# Altium PCB Светотиристор.PcbDoc
Units mm, origin at the board's own origin, x right, y up, seen from the top; angles counter-clockwise.
Board outline 33.78 x 40.89 mm, 2 copper layers (Top Layer, Bottom Layer); 2 components, 0 nets, 56 pads, 0 vias.
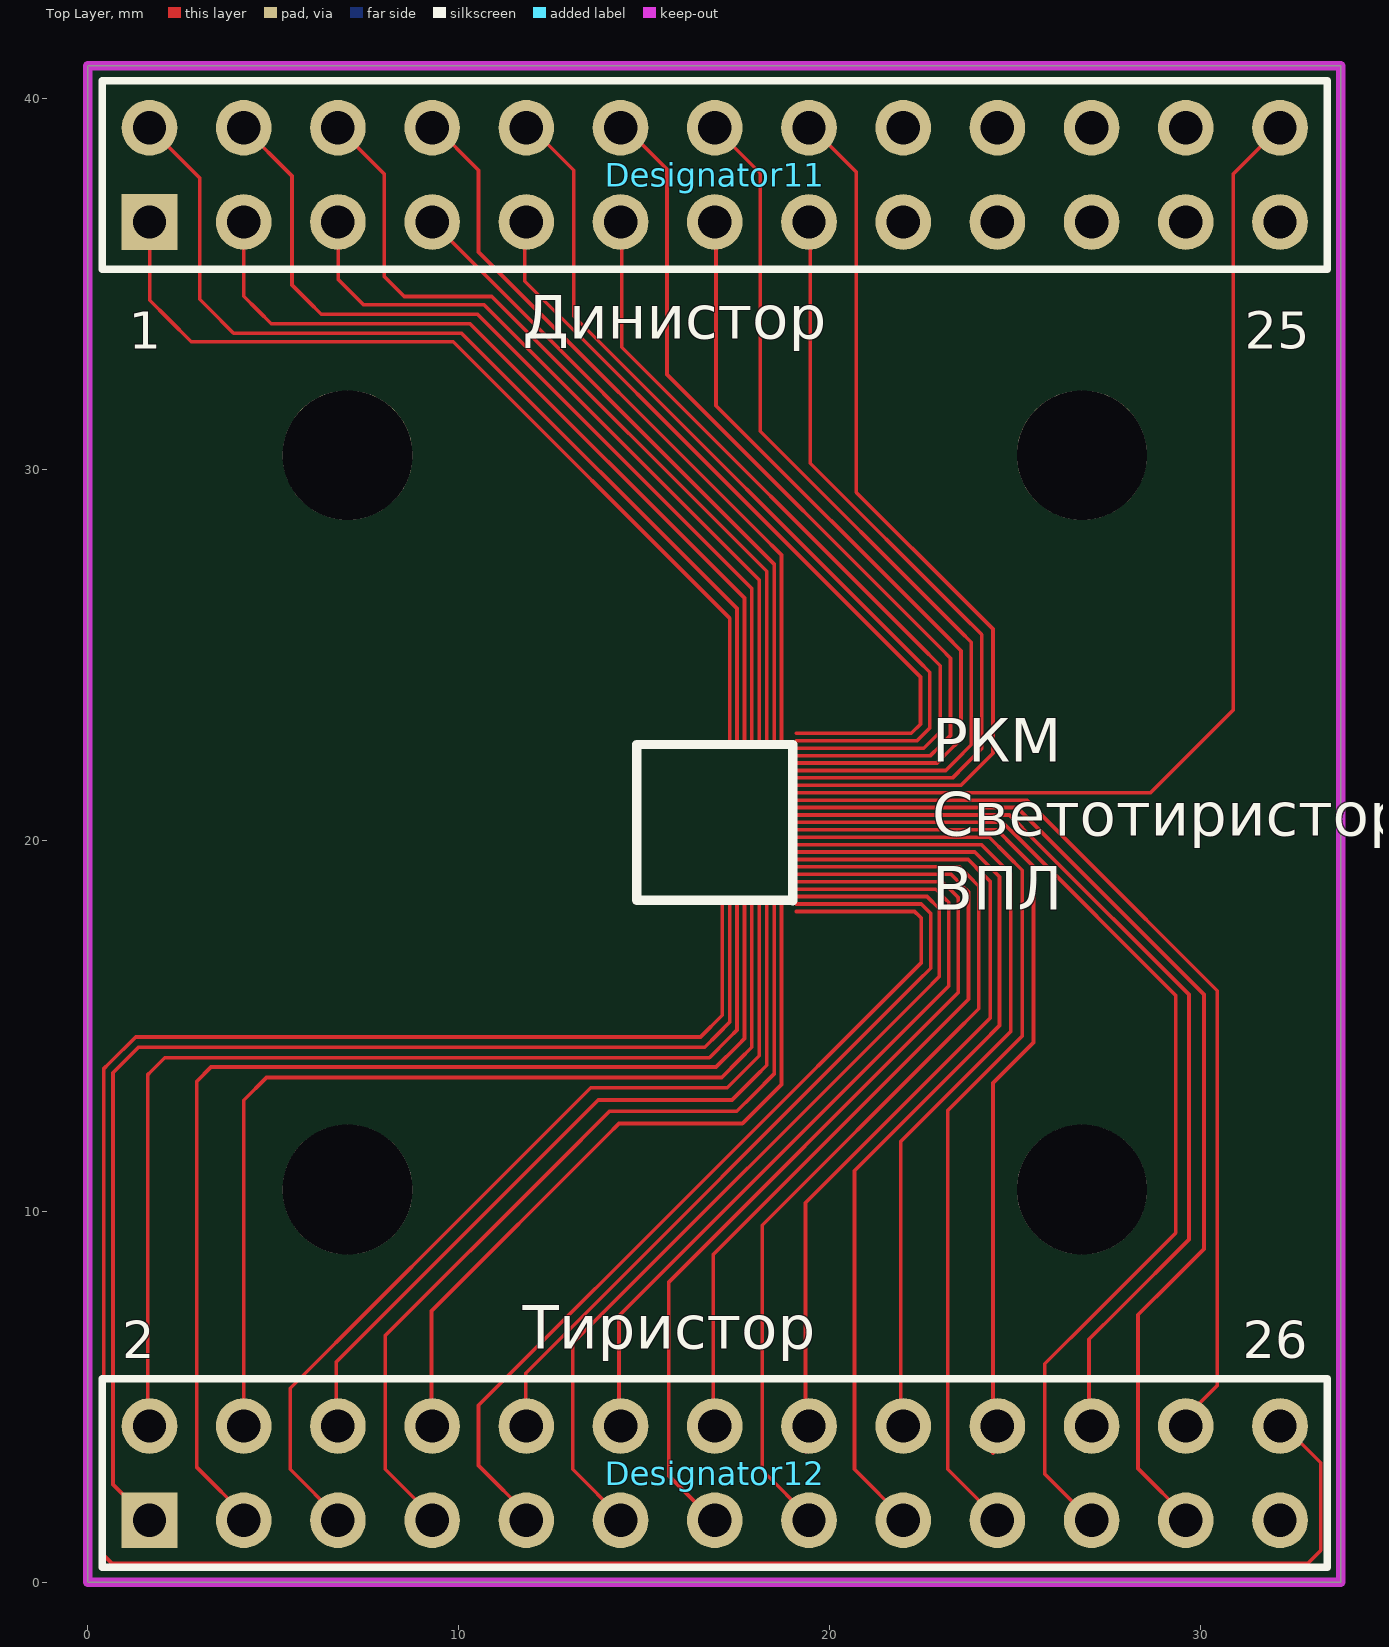
[diagram p0: Top Layer view]
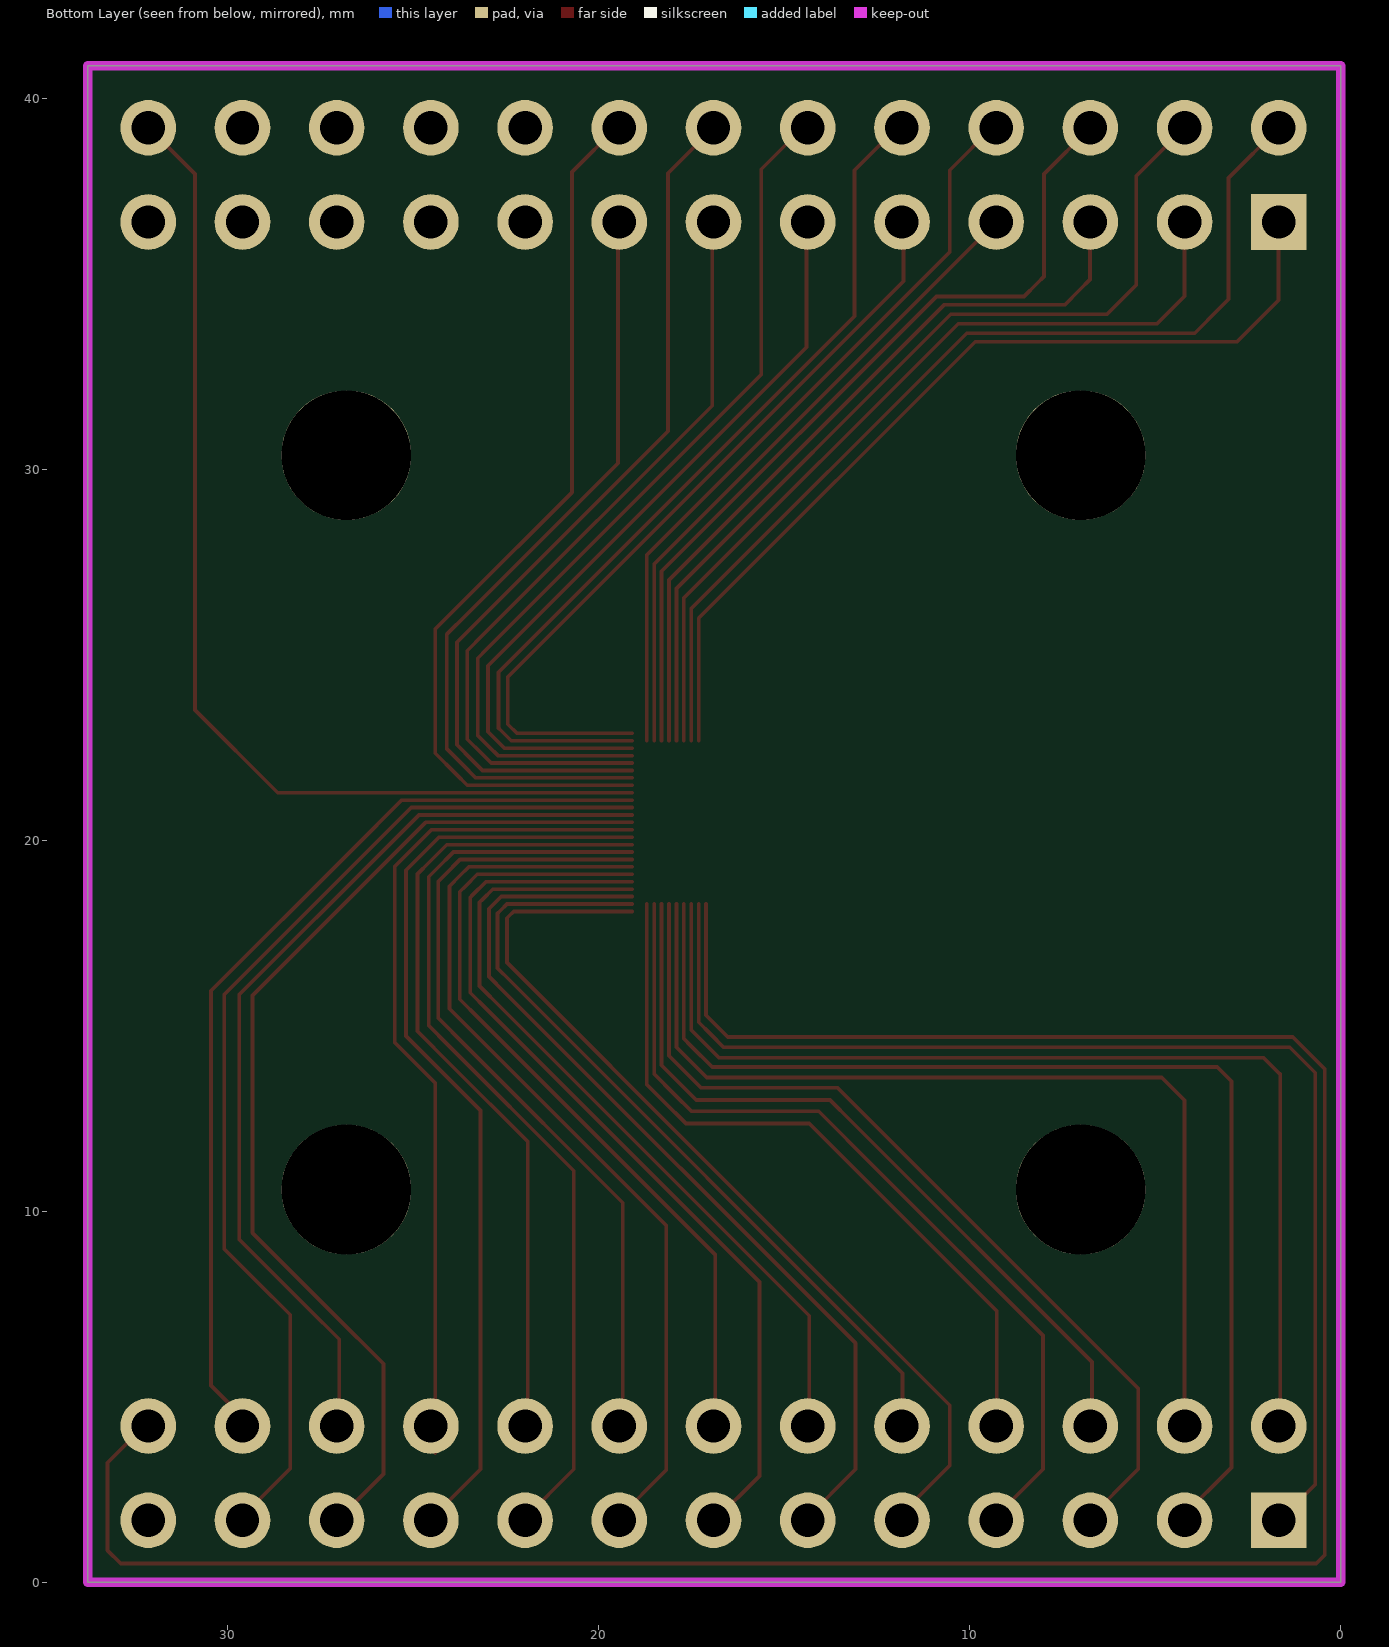
[diagram p1: Bottom Layer view, seen from below]

## Layer stack, top to bottom
Top Solder: solder mask 0.0102, Solder Resist, Dk 3.5
Top Layer: signal copper 0.0356
Dielectric 1: dielectric 0.32, FR-4, Dk 4.8
Bottom Layer: signal copper 0.0356
Bottom Solder: solder mask 0.0102, Solder Resist, Dk 3.5

## Board outline
0,0 0,40.894 33.784,40.894 33.784,0

## Design rules (kind name [scope] priority, off if disabled: settings)
Clearance [All] p1: gap=0 ignorepadtopadclearanceinfootprint=FALSE
PolygonConnect [All] p1: connectstyle=Relief reliefconductorwidth=0.254 reliefentries=4 polygonreliefangle="90 Angle" airgapwidth=0.254
RoutingVias [All] p1: holewidth=0.711 width=1.27 viastyle="Through Hole" minholewidth=0.711 minwidth=1.27 maxholewidth=0.711 maxwidth=1.27
SolderMaskExpansion [All] p1: expansion=0.102 istentingtop=FALSE
Width [All] p1: maxlimit=0.254 minlimit=0.1 preferedwidth=0.254
30 further rules are at their usual default settings.

## Components (designator, comment, footprint, x,y, rotation, side; value= is the part's Value field where it differs from the comment)
Designator11 "Comment" HDR2X13 1.669,36.678 r0 top
Designator12 "Comment" HDR2X13 1.669,1.676 r0 top

## Footprints (in the part's own frame and the unit in brackets; to place one, negate y for a bottom-side part, rotate by r counter-clockwise, add the part's x,y. Pads: shape width x height; smd on the part's side, far side on the other; paste and mask are expansions set on the pad)
HDR2X13 [mm] "Connector; Header; 13x2 Position"
  rect 1.5x1.5 hole 0.9: 1(0,0)
  round 1.5 hole 0.9: 2(0,2.54) 3(2.54,0) 4(2.54,2.54) 5(5.08,0) 6(5.08,2.54) 7(7.62,0) 8(7.62,2.54) 9(10.16,0) 10(10.16,2.54) 11(12.7,0) 12(12.7,2.54) 13(15.24,0) 14(15.24,2.54) 15(17.78,0) 16(17.78,2.54) 17(20.32,0) 18(20.32,2.54) 19(22.86,0) 20(22.86,2.54) 21(25.4,0) 22(25.4,2.54) 23(27.94,0) 24(27.94,2.54) 25(30.48,0) 26(30.48,2.54)
  silkscreen extent -1.27,-1.27 31.75,3.81

## Free pads (board coordinates)
  round 3.5 hole 3.5 unplated: 3(7.009,30.39) 3(7.01,10.591) 3(26.808,10.591) 3(26.808,30.39)

## Nets (pads, with @x,y where several pads share a name; then routed paths per layer and width w, separated by ;. In a path a pad name is that pad's centre, name@x,y a point inside that pad or via, vN(x,y) a via of type N, cw(c..) or ccw(c..) an arc to the next point about the centre after c; other vN are vias at no path point)
pads on no net: Designator11.1 Designator11.2 Designator11.3 Designator11.4 Designator11.5 Designator11.6 Designator11.7 Designator11.8 Designator11.9 Designator11.10 Designator11.11 Designator11.12 Designator11.13 Designator11.14 Designator11.15 Designator11.16 Designator11.17 Designator11.18 Designator11.19 Designator11.20 Designator11.21 Designator11.22 Designator11.23 Designator11.24 Designator11.25 Designator11.26 Designator12.1 Designator12.2 Designator12.3 Designator12.4 Designator12.5 Designator12.6 Designator12.7 Designator12.8 Designator12.9 Designator12.10 Designator12.11 Designator12.12 Designator12.13 Designator12.14 Designator12.15 Designator12.16 Designator12.17 Designator12.18 Designator12.19 Designator12.20 Designator12.21 Designator12.22 Designator12.23 Designator12.24 Designator12.25 Designator12.26
copper on no net: | length 1068.1
  Top Layer w0.1: 1.626,4.216 1.626,13.691 1.702,13.767 2.083,14.148 16.205,14.148 16.764,14.148 17.297,14.681 17.509,14.893 17.509,15.291 17.509,17.791 17.509,18.291 ; 1.66,1.667 0.686,2.642 0.686,12.065 0.686,13.741 1.168,14.224 1.372,14.427 16.205,14.427 16.637,14.427 16.993,14.783 17.309,15.099 17.309,15.291 17.309,17.791 17.309,18.291 ; 1.669,39.218 3.023,37.864 3.023,36.551 3.023,34.595 3.251,34.366 3.937,33.68 8.814,33.68 10.084,33.68 17.509,26.255 17.509,25.691 17.509,23.191 17.509,22.691 ; 1.676,36.678 1.676,34.569 2.184,34.061 2.794,33.452 6.401,33.452 9.855,33.452 17.309,25.998 17.309,23.191 17.309,22.691 ; 4.209,4.216 4.209,12.997 4.826,13.614 16.307,13.614 17.094,13.614 17.577,14.097 17.909,14.429 17.909,15.291 17.909,17.791 17.909,18.291 ; 4.209,36.678 4.209,34.678 4.597,34.29 4.953,33.934 8.28,33.934 10.312,33.934 17.709,26.538 17.709,25.691 17.709,23.191 17.709,22.691 ; 4.209,39.218 5.512,37.915 5.512,36.246 5.512,34.976 5.944,34.544 6.299,34.188 9.119,34.188 10.516,34.188 17.909,26.795 17.909,25.691 17.909,23.191 17.909,22.691 ; 4.289,1.756 2.946,3.099 2.946,3.81 2.946,13.513 3.327,13.894 16.358,13.894 16.942,13.894 17.526,14.478 17.709,14.661 17.709,15.291 17.709,17.791 17.709,18.291 ; 6.706,4.216 6.706,5.944 13.183,12.421 13.767,13.005 16.84,13.005 17.374,13.005 18.009,13.64 18.309,13.94 18.309,15.291 18.309,17.791 18.309,18.291 ; 6.753,39.221 8.001,37.973 8.001,37.084 8.001,35.204 8.179,35.027 8.534,34.671 9.144,34.671 10.897,34.671 18.309,27.259 18.309,25.691 18.309,23.191 18.309,22.691 ; 6.756,36.678 6.756,35.128 7.036,34.849 7.442,34.442 9.068,34.442 10.693,34.442 18.109,27.027 18.109,25.691 18.109,23.191 18.109,22.691 ; 6.791,1.718 5.461,3.048 5.461,3.937 5.461,5.232 7.899,7.671 9.601,9.373 13.564,13.335 14.351,13.335 17.247,13.335 18.109,14.197 18.109,15.291 18.109,17.791 18.109,18.291 ; 9.271,4.216 9.271,7.315 13.995,12.04 14.326,12.37 16.764,12.37 17.653,12.37 18.263,12.979 18.709,13.426 18.709,15.291 18.709,17.791 18.709,18.291 ; 9.289,36.678 18.509,27.458 18.509,25.691 18.509,23.191 18.509,22.691 ; 9.343,39.272 10.541,38.075 10.541,36.932 10.541,35.865 18.136,28.27 18.709,27.697 18.709,25.691 18.709,23.191 18.709,22.691 ; 9.728,1.346 8.026,3.048 8.026,5.029 8.026,6.655 12.573,11.201 14.072,12.7 16.84,12.7 17.501,12.7 17.958,13.157 18.509,13.708 18.509,15.291 18.509,17.791 18.509,18.291 ; 11.786,36.678 11.786,35.077 17.831,29.032 22.454,24.409 22.454,23.139 22.205,22.891 22.109,22.891 19.609,22.891 19.109,22.891 ; 11.811,3.658 11.811,5.639 22.377,16.205 22.733,16.561 22.733,17.424 22.733,18.034 22.657,18.11 22.476,18.291 22.109,18.291 19.609,18.291 19.109,18.291 ; 11.896,39.285 13.106,38.075 13.106,36.449 13.106,34.138 22.403,24.841 22.708,24.536 22.708,23.927 22.708,23.038 22.631,22.962 22.36,22.691 22.109,22.691 19.609,22.691 19.109,22.691 ; 11.922,1.769 10.541,3.15 10.541,3.835 10.541,4.775 16.866,11.1 22.479,16.713 22.479,17.399 22.479,17.907 22.428,17.958 22.295,18.091 22.109,18.091 19.609,18.091 19.109,18.091 ; 14.326,4.064 14.326,7.188 22.606,15.469 23.216,16.078 23.216,16.967 23.216,18.339 23.139,18.415 22.864,18.691 22.109,18.691 19.609,18.691 19.109,18.691 ; 14.402,36.678 14.402,33.299 22.403,25.298 22.987,24.714 22.987,23.927 22.987,22.936 22.784,22.733 22.541,22.491 22.109,22.491 19.609,22.491 19.109,22.491 ; 14.411,1.718 13.081,3.048 13.081,4.547 13.081,6.452 22.555,15.926 22.962,16.332 22.962,18.161 22.632,18.491 22.109,18.491 19.609,18.491 19.109,18.491 ; 14.436,39.285 15.621,38.1 15.621,36.373 15.621,32.563 23.012,25.171 23.266,24.917 23.266,23.622 23.266,22.835 22.962,22.53 22.722,22.291 22.109,22.291 19.609,22.291 19.109,22.291 ; 16.491,39.636 16.909,39.218 18.136,37.991 18.136,36.449 18.136,31.039 23.52,25.654 23.825,25.349 23.825,23.292 23.825,22.581 23.393,22.149 23.135,21.891 22.109,21.891 19.609,21.891 19.109,21.891 ; 16.866,4.216 16.866,8.839 23.216,15.189 23.749,15.723 23.749,17.374 23.749,18.618 23.597,18.771 23.277,19.091 22.109,19.091 19.609,19.091 19.109,19.091 ; 16.887,1.655 15.672,2.87 15.672,4.064 15.672,8.103 23.012,15.443 23.47,15.9 23.47,17.272 23.47,18.466 23.419,18.517 23.045,18.891 22.109,18.891 19.609,18.891 19.109,18.891 ; 16.942,36.678 16.942,31.725 23.114,25.552 23.546,25.121 23.546,24.232 23.546,22.733 23.165,22.352 22.903,22.091 22.109,22.091 19.609,22.091 19.109,22.091 ; 17.109,18.291 17.109,17.791 17.109,15.291 16.525,14.707 6.807,14.707 1.295,14.707 0.584,13.995 0.432,13.843 0.432,12.624 0.432,0.737 0.66,0.508 9.119,0.508 32.893,0.508 33.249,0.864 33.249,3.226 32.203,4.271 ; 19.109,19.291 19.609,19.291 22.109,19.291 23.508,19.291 23.749,19.05 24.028,18.771 24.028,17.272 24.028,15.469 23.292,14.732 18.186,9.627 18.186,3.683 18.186,3.023 19.491,1.718 ; 19.109,19.491 19.609,19.491 22.109,19.491 23.74,19.491 24.155,19.075 24.333,18.898 24.333,17.475 24.333,15.215 23.597,14.478 19.355,10.236 19.355,3.531 ; 19.109,19.691 19.609,19.691 22.109,19.691 23.921,19.691 24.384,19.228 24.587,19.025 24.587,18.059 24.587,15.011 24.079,14.503 20.676,11.1 20.676,3.988 20.676,3.048 22.018,1.706 ; 19.109,19.891 19.609,19.891 22.109,19.891 24.102,19.891 24.562,19.431 24.892,19.101 24.892,17.805 24.892,14.859 23.978,13.945 21.92,11.887 21.92,4.216 ; 19.109,20.091 19.609,20.091 22.109,20.091 24.309,20.091 24.79,19.609 25.197,19.202 25.197,17.653 25.197,14.732 24.282,13.818 23.19,12.725 23.19,4.191 23.19,3.048 24.917,1.321 ; 19.109,20.291 19.609,20.291 22.109,20.291 24.515,20.291 25.019,19.787 25.502,19.304 25.502,17.247 25.502,14.554 24.816,13.868 24.409,13.462 24.409,3.48 ; 19.109,20.491 19.609,20.491 22.109,20.491 24.671,20.491 25.095,20.066 29.337,15.824 29.337,10.693 29.337,9.423 27.178,7.264 25.806,5.893 25.806,3.988 25.806,2.921 27.06,1.667 ; 19.109,20.691 19.609,20.691 22.109,20.691 24.852,20.691 25.578,19.964 29.693,15.85 29.693,10.084 29.693,9.246 27.838,7.391 27,6.553 27,4.216 ; 19.109,20.891 19.609,20.891 22.109,20.891 25.058,20.891 26.34,19.609 30.099,15.85 30.099,10.236 30.099,8.992 29.261,8.153 28.321,7.214 28.321,4.775 28.321,3.073 29.663,1.731 ; 19.109,21.091 19.609,21.091 22.109,21.091 25.315,21.091 26.645,19.761 30.455,15.951 30.455,8.128 30.455,5.309 29.486,4.34 ; 19.109,21.291 19.609,21.291 22.109,21.291 28.657,21.291 30.886,23.52 30.886,36.5 30.886,37.973 32.14,39.227 ; 19.109,21.491 19.609,21.491 22.109,21.491 23.548,21.491 23.851,21.793 24.409,22.352 24.409,22.885 24.409,25.705 23.698,26.416 20.726,29.388 20.726,36.525 20.726,38.024 19.491,39.259 ; 19.109,21.691 19.609,21.691 22.109,21.691 23.316,21.691 23.66,22.035 24.105,22.479 24.105,22.962 24.105,25.552 23.546,26.111 19.482,30.175 19.482,37.109

## Keep-outs
Keep-Out Layer:
  the board outline again, w0.254

## Silkscreen, mask and mechanical layers (free items; w line width, h text height)
Top Overlay:
  lines w0.254: 14.809,18.391 14.809,18.391 ; 14.809,18.391 14.809,18.391 ; 14.809,18.391 14.809,18.391 ; 14.809,18.391 19.009,18.391 ; 14.809,18.391 14.809,22.591 ; 14.809,22.591 14.809,22.591 ; 14.809,22.591 14.809,22.591 ; 14.809,22.591 19.009,22.591 ; 19.009,18.38 19.009,18.391 ; 19.009,18.38 19.009,18.391 ; 19.009,18.38 19.009,18.391 ; 19.009,18.391 19.009,18.391 ; 19.009,18.391 19.009,22.591 ; 19.009,22.591 19.009,22.591
  text "1" at 1.112,33.266 h1
  text "25" at 31.199,33.266 h1
  text "Динистор" at 11.726,33.139 h2
  text "РКМ / Светотиристор / ВПЛ" at 22.766,17.738 h2
  text "2" at 0.934,6.037 h1
  text "26" at 31.148,6.037 h1
  text "Тиристор" at 11.726,5.91 h2
Top Solder:
  region: 13.665,25.171 13.665,15.977 21.488,15.977 21.488,25.171